# Altium PCB Switch.PcbDoc
Units mm, origin at the board's own origin, x right, y up, seen from the top; angles counter-clockwise.
Board outline 7 x 31 mm, 2 copper layers (Top Layer, Bottom Layer); 2 components, 2 nets, 16 pads, 7 vias.
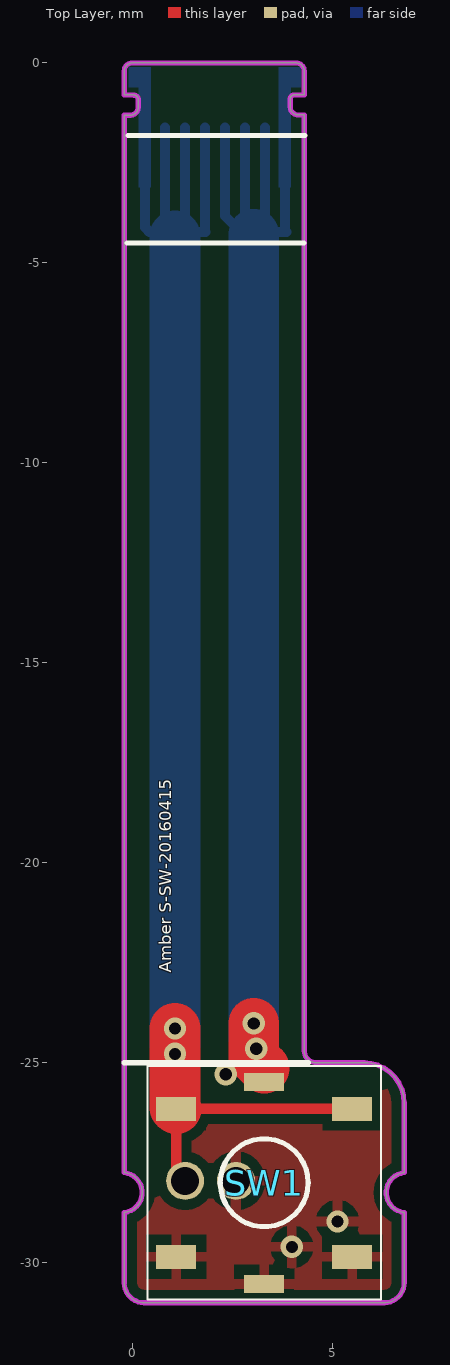
[diagram p0: Top Layer view]
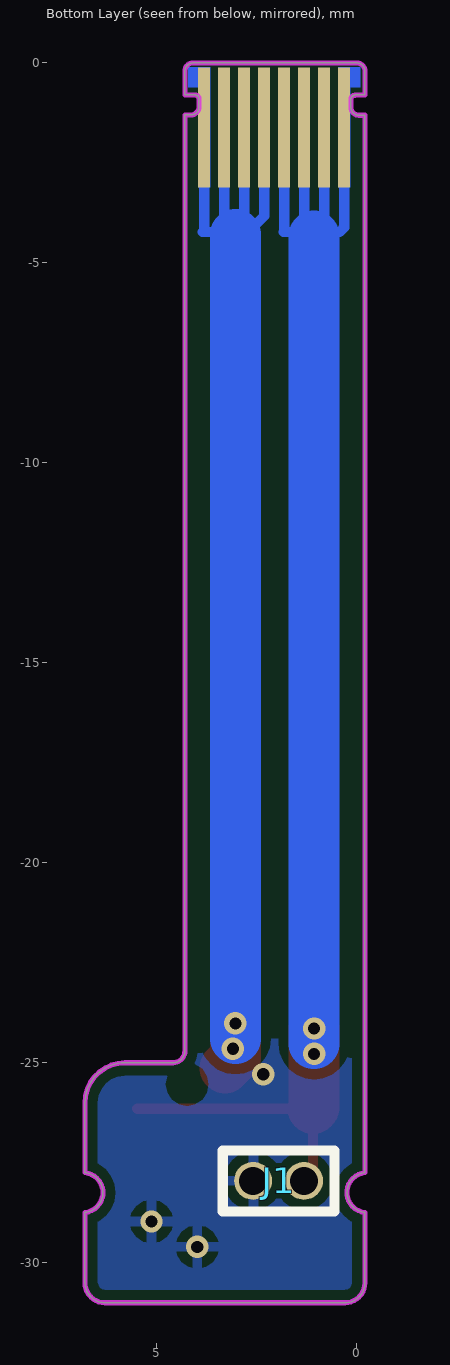
[diagram p1: Bottom Layer view, seen from below]

## Layer stack, top to bottom
Top Layer: signal copper 0.0356
Dielectric: dielectric 0.32, FR-4, Dk 4.8
Bottom Layer: signal copper 0.0356

## Board outline
-0.2,-30.496 -0.2,-28.738 ccw(c-0.25,-28.241) -0.2,-27.743 -0.2,-1.308 -0.05,-1.308 ccw(c-0.05,-1.108) 0.15,-1.108 0.15,-0.908 ccw(c0.05,-0.908) 0.05,-0.808 0.05,-0.8 -0.2,-0.8 -0.2,-0.2 cw(c0,-0.2) 0,0 4.1,0 cw(c4.1,-0.2) 4.3,-0.2 4.3,-0.8 4.05,-0.8 ccw(c4.05,-0.9) 3.95,-0.9 3.95,-1.1 ccw(c4.15,-1.1) 4.15,-1.3 4.3,-1.3 4.3,-1.308 4.3,-24.696 ccw(c4.6,-24.696) 4.6,-24.996 5.8,-24.996 cw(c5.8,-25.996) 6.8,-25.996 6.8,-27.743 ccw(c6.85,-28.241) 6.8,-28.738 6.8,-30.496 cw(c6.3,-30.496) 6.3,-30.996 0.3,-30.996 cw(c0.3,-30.496)

## Design rules (kind name [scope] priority, off if disabled: settings)
Clearance [All] p1: gap=0.254
MinimumSolderMaskSliver [All] p1: minsoldermaskwidth=0
PolygonConnect [All] p1: connectstyle=Relief reliefconductorwidth=0.254 reliefentries=4 polygonreliefangle="90 Angle"
RoutingVias [All] p1: holewidth=0.711 width=1.27 viastyle="Through Hole" minholewidth=0.711 minwidth=1.27 maxholewidth=0.711 maxwidth=1.27
SilkscreenOverComponentPads [All] p1: minsilkscreentomaskgap=0
SolderMaskExpansion [All] p1: expansion=0.102
Width [All] p1: maxlimit=1.27 minlimit=0.254 preferedwidth=0.254
26 further rules are at their usual default settings.

## Components (designator, comment, footprint, x,y, rotation, side; value= is the part's Value field where it differs from the comment)
J1 "Debug" Debug-2Pin 1.959,-27.948 r0 bottom
SW1 "Switch_1" EVQPLD 3.3,-27.996 r270 top

## Footprints (in the part's own frame and the unit in brackets; to place one, negate y for a bottom-side part, rotate by r counter-clockwise, add the part's x,y. Pads: shape width x height; smd on the part's side, far side on the other; paste and mask are expansions set on the pad)
Debug-2Pin [mm]
  round 0.95 hole 0.7: 1(-0.635,0) 2(0.635,0)
  silkscreen extent -1.4,-0.76 1.4,0.76, body extent -1.21,-0.58 1.21,0.58
EVQPLD [mm]
  rect 0.6x1 smd: A(-1.85,2.2) A'(-1.85,-2.2) B(1.85,2.2) B'(1.85,-2.2)
  rect 0.45x1 smd: C(-2.525,0) C'(2.525,0)
  silkscreen extent -2.92,-2.92 2.92,2.92

## Part data
J1: library part Debug_1, "厂?"
SW1: "厂?"

## Free pads (board coordinates)
  rect 0.3x3 smd far side: 1(0.318,-1.611) 2(0.818,-1.611) 3(1.318,-1.611) 4(1.818,-1.611) 5(2.318,-1.611) 6(2.818,-1.611) 7(3.318,-1.611) 8(3.818,-1.611)

## Via types
v1: diameter 0.559, hole 0.305, Top Layer to Bottom Layer, tented both sides, 7 vias

## Nets (pads, with @x,y where several pads share a name; then routed paths per layer and width w, separated by ;. In a path a pad name is that pad's centre, name@x,y a point inside that pad or via, vN(x,y) a via of type N, cw(c..) or ccw(c..) an arc to the next point about the centre after c; other vN are vias at no path point)
GND: J1.2 pad.5 pad.6 pad.7 pad.8 SW1.B SW1.B' SW1.C SW1.C' | length 33.2
  Top Layer w1.27: v1(3.039,-24.011) 3.039,-24.868 3.3,-25.13
  Bottom Layer w0.254: pad.5 2.318,-3.826 2.721,-4.229 ; pad.6 2.818,-4.132 2.721,-4.229 ; pad.7 3.318,-4.191 3.356,-4.229 ; pad.8 3.818,-4.191 3.856,-4.229 3.356,-4.229 ; 2.721,-4.229 2.975,-4.229 3.356,-4.229
  Bottom Layer w1.27: v1@3.039,-24.392 v1(3.039,-24.011) 3.039,-4.292
  other v1: 3.991,-29.599 5.134,-28.964 2.34,-25.281 3.102,-24.646
SWITCH_KEY: J1.1 pad.1 pad.2 pad.3 pad.4 SW1.A SW1.A' | length 40.5
  Top Layer w0.254: J1.1 1.1,-27.724 SW1.A' SW1.A
  Top Layer w1.27: v1(1.07,-24.138) v1(1.07,-24.773) 1.07,-26.116 SW1.A'
  Bottom Layer w0.254: pad.1 0.318,-4.112 0.435,-4.229 0.689,-4.229 ; pad.2 0.818,-4.1 0.689,-4.229 ; pad.3 1.318,-4.171 1.261,-4.229 ; pad.4 1.818,-4.215 1.832,-4.229 1.261,-4.229 ; 0.689,-4.229 1.261,-4.229
  Bottom Layer w1.27: v1@1.07,-24.519 v1(1.07,-24.138) 1.07,-4.326

## Polygon pours and split planes (outlines as drawn)
GND on Bottom Layer "Bottom Layer-No Net" (solid, remove dead copper, pour order 8): -0.2,-24.392 7.928,-24.392 7.801,-24.519 7.801,-31.504 -0.835,-31.504
GND on Top Layer "Bottom Layer-No Net" (solid, remove dead copper, pour order 10): -0.581,-24.265 -0.327,-24.519 7.547,-24.519 7.547,-31.123 7.42,-31.25 7.039,-31.631 -0.454,-31.631

## Keep-outs
Keep-Out Layer:
  lines w0.127: 0.05,-0.808 cw(c0.05,-0.908) 0.15,-0.908 0.15,-1.108 cw(c-0.05,-1.108) -0.05,-1.308 -0.2,-1.308 -0.2,-27.743 cw(c-0.25,-28.241) -0.2,-28.738 -0.2,-30.496 ccw(c0.3,-30.496) 0.3,-30.996 6.3,-30.996 ccw(c6.3,-30.496) 6.8,-30.496 6.8,-28.738 cw(c6.85,-28.241) 6.8,-27.743 6.8,-25.996 ccw(c5.8,-25.996) 5.8,-24.996 4.6,-24.996 cw(c4.6,-24.696) 4.3,-24.696 4.3,-1.308 ; 0.05,-0.8 -0.2,-0.8 -0.2,-0.2 cw(c0,-0.2) 0,0 4.1,0 cw(c4.1,-0.2) 4.3,-0.2 4.3,-0.8 4.05,-0.8 ccw(c4.05,-0.9) 3.95,-0.9 3.95,-1.1 ccw(c4.15,-1.1) 4.15,-1.3 4.3,-1.3

## Other copper
Bottom Layer:
  region net SWITCH_KEY: -0.082,-0.111 0.468,-0.111 0.468,-3.111 0.168,-3.111 0.168,-0.611 -0.082,-0.611
  region net GND: 3.668,-0.111 3.668,-3.111 3.968,-3.111 3.968,-0.611 4.218,-0.611 4.218,-0.111

## Silkscreen, mask and mechanical layers (free items; w line width, h text height)
Top Overlay:
  circle w0.127: c3.3,-27.996 r1.1
  lines w0.127: -0.2,-24.996 4.4,-24.996 ; -0.127,-4.5 4.293,-4.5 ; -0.102,-1.811 4.318,-1.811
  text "Amber S-SW-20160415" at 1.07,-22.741 h0.51 r90